# Altium PCB sim800L.PcbDoc
Units mm, origin at the board's own origin, x right, y up, seen from the top; angles counter-clockwise.
Board outline 43.9 x 53.63 mm, 2 copper layers (Top Layer, Bottom Layer); 44 components, 34 nets, 200 pads, 94 vias.
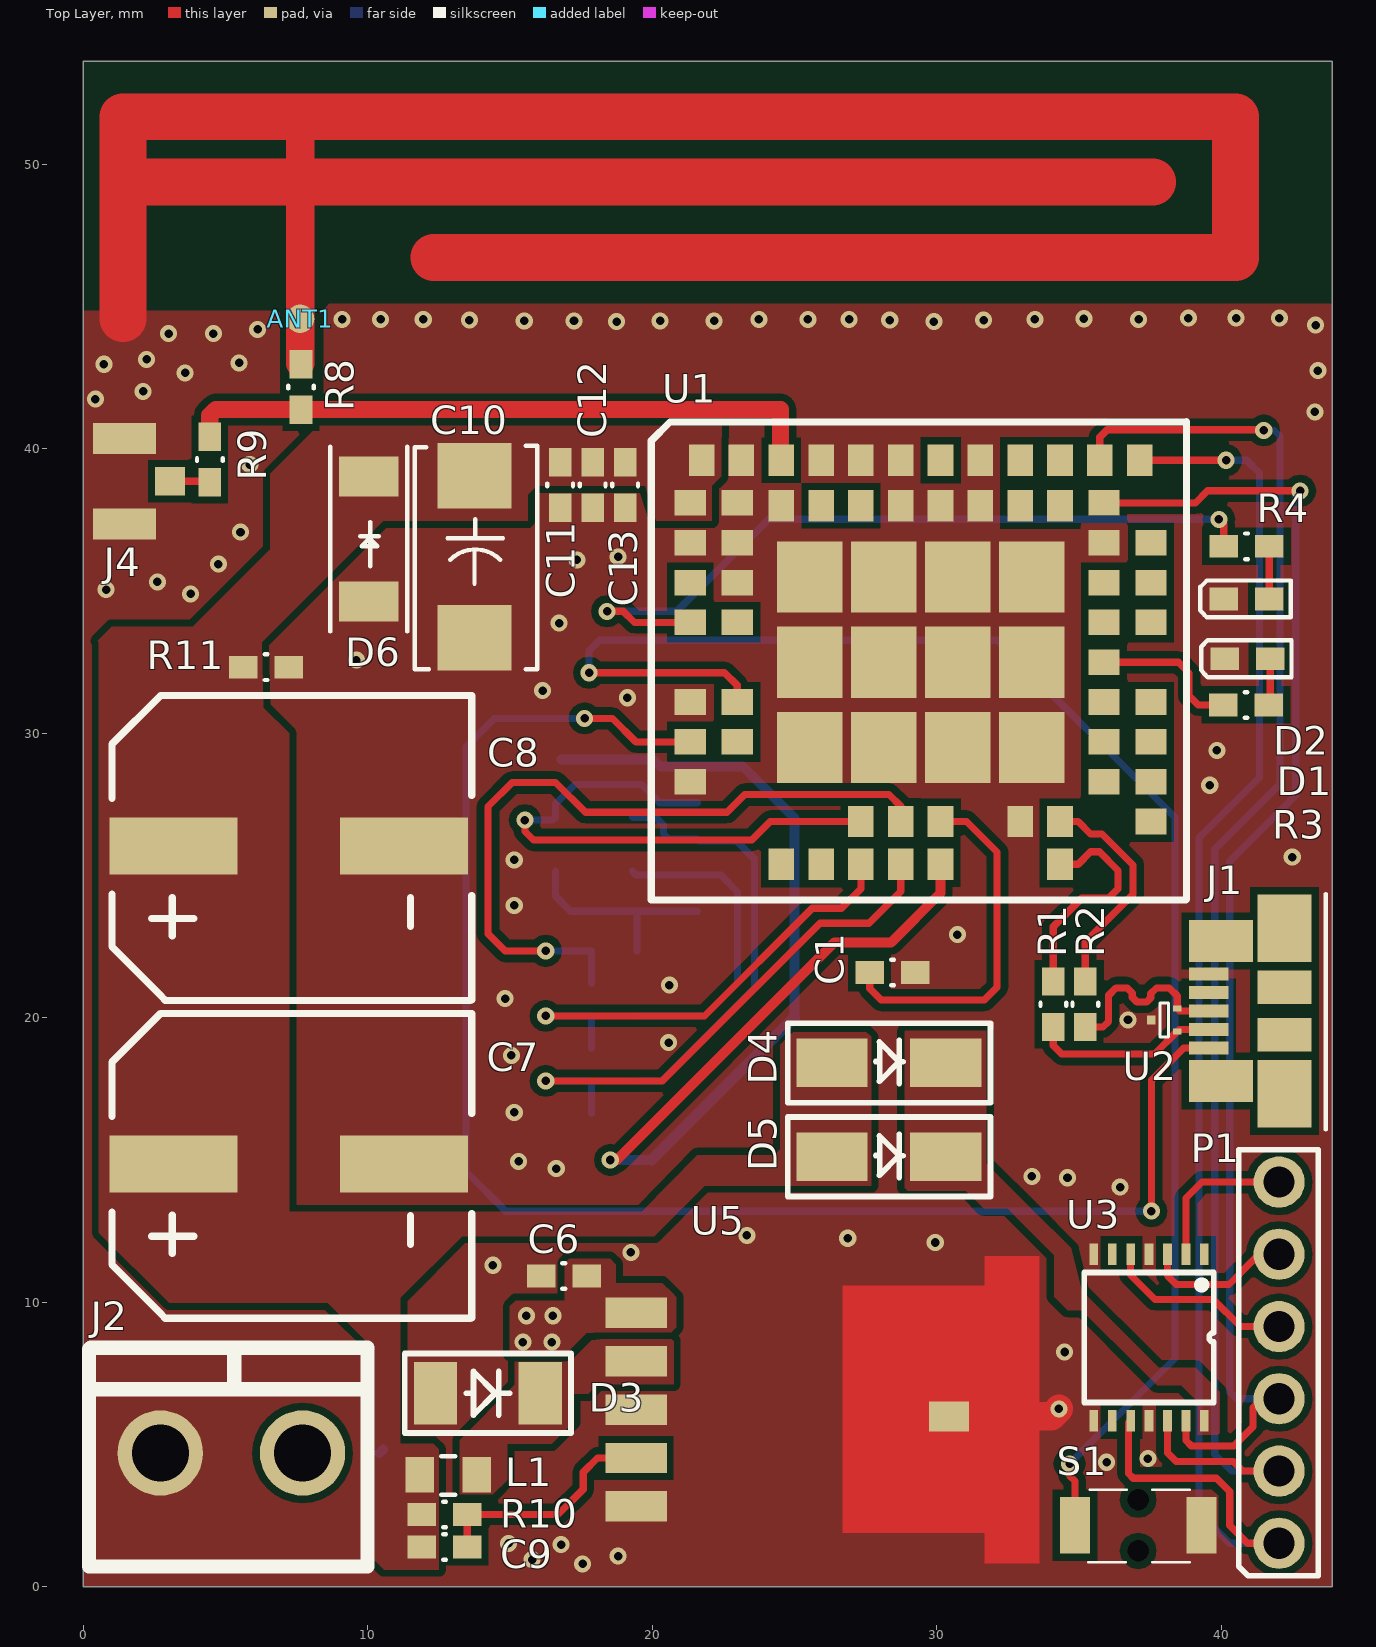
[diagram p0: Top Layer view]
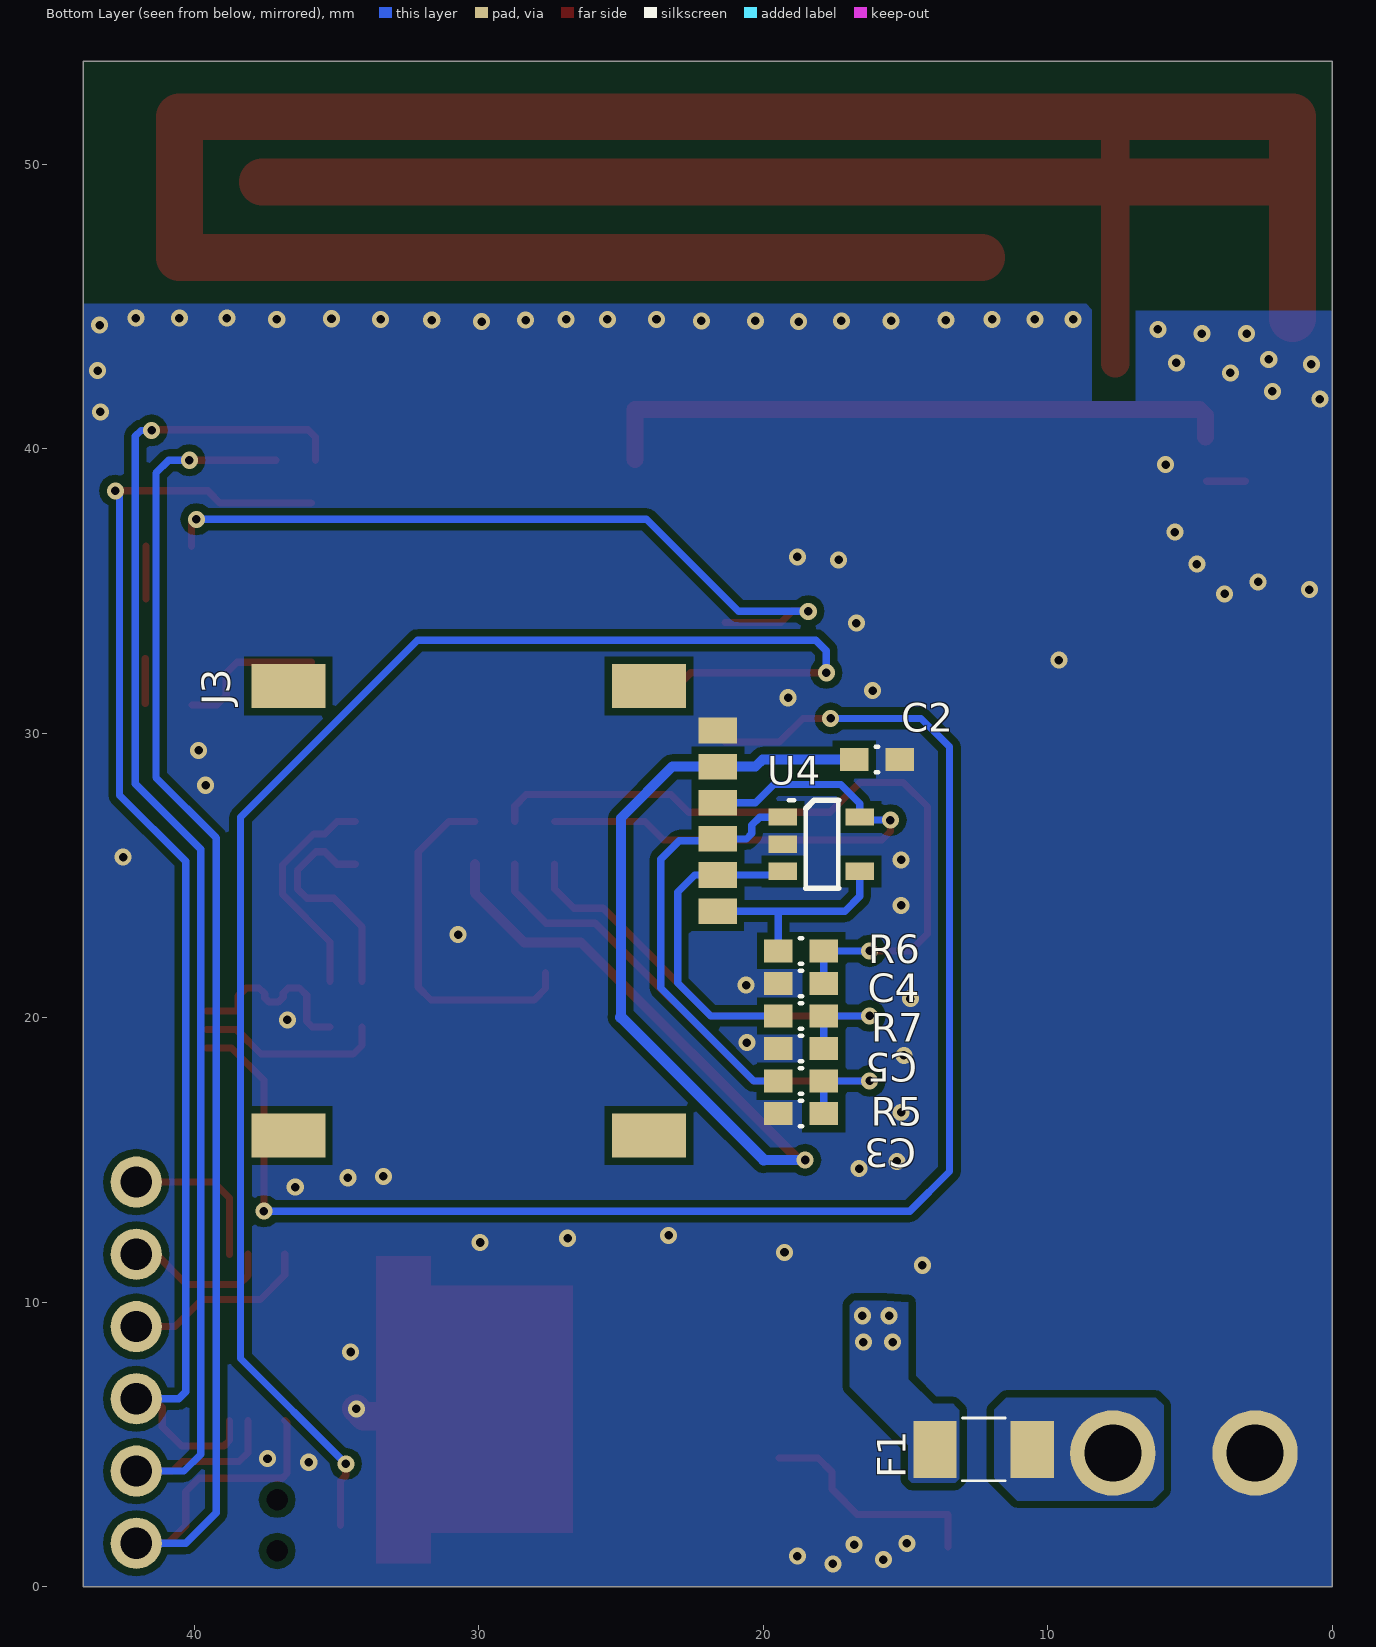
[diagram p1: Bottom Layer view, seen from below]

## Layer stack, top to bottom
Top Solder: solder mask 0.0102, Solder Resist, Dk 3.5
Top Layer: signal copper 0.0356
Dielectric 1: dielectric 0.32, FR-4, Dk 4.8
Bottom Layer: signal copper 0.0356
Bottom Solder: solder mask 0.0102, Solder Resist, Dk 3.5

## Board outline
0,53.625 0,0 43.9,0 43.9,53.625

## Design rules (kind name [scope] priority, off if disabled: settings)
Clearance Clk [InNetClass('Clk')] p1: gap=0.26 except(0.2: SMDPad-SMDPad)
Clearance [All] p2: gap=0.254 except(0.1: SMDPad-SMDPad)
DiffPairsRouting [All] p1: maxlimit=0.254 minlimit=0.254 mostfreqgap=0.254 toplayer_minwidth=0.254 toplayer_maxwidth=0.254 toplayer_prefwidth=0.254 bottomlayer_minwidth=0.254 bottomlayer_maxwidth=0.254 bottomlayer_prefwidth=0.254 maxuncoupledlength=12.7
MatchedLengths [InNetClass('DIFFPAIR')] p1: tolerance=0.1 checknetsindiffpair=FALSE checkdiffpairvsdiffpair=FALSE checkothers=TRUE
MinimumSolderMaskSliver [All] p1: minsoldermaskwidth=0.05
NetAntennae [InComponent('ANT1')] p1: netantennaetolerance=400
PlaneConnect [All] p1: planeconnectstyle=Direct reliefexpansion=0.508 reliefentries=4 reliefconductorwidth=0.254 reliefairgap=0.254
PolygonConnect [All] p1: connectstyle=Direct reliefconductorwidth=0.254 reliefentries=4 polygonreliefangle="90 Angle" airgapwidth=0.254
RoutingVias [All] p1: holewidth=0.3 width=0.6 viastyle="Through Hole" minholewidth=0.3 minwidth=0.6 maxholewidth=0.3 maxwidth=0.6
SilkToSilkClearance [All] p1: silktosilkclearance=0.1
SilkToSolderMaskClearance [IsPad] p1: minsilkscreentomaskgap=0 clearancetoexposedcopper=TRUE
SolderMaskExpansion [All] p1: expansion=0.102
Width Antenna [InNet('GND')] p1: maxlimit=1.7 minlimit=0.9 preferedwidth=1
Width RF [InNetClass('RF')] p2: maxlimit=0.6 minlimit=0.6 preferedwidth=0.6
Width Power [InNetClass('Power')] p3: maxlimit=0.4 minlimit=0.3 preferedwidth=0.35
Width [All] p4: maxlimit=0.275 minlimit=0.254 preferedwidth=0.254
24 further rules are at their usual default settings.

## Classes and differential pairs
net class DIFFPAIR: USB_N USB_P USBR_N USBR_P
net class Power: NetD3_K NetF1_1 SIMVCC VCC VIN
net class RF: RF
net class Clk: SIMCLK
net class SIM: SIM_VPP SIMCLK SIMDATA SIMRST SIMVCC
differential pair USBR: +USBR_P -USBR_N
differential pair USB: +USB_P -USB_N

## Components (designator, comment, footprint, x,y, rotation, side; value= is the part's Value field where it differs from the comment)
ANT1 "GSM-ANT" GSM-ANTENNA 1.397,44.577 r0 top
C1 "Cap" 0603 28.448,21.59 r180 top
C2 "Cap" 0603 16.002,29.083 r180 bottom
C3 "Cap" 0603 18.669,16.637 r180 bottom
C4 "Cap" 0603 18.669,21.209 r180 bottom
C5 "Cap" 0603 18.669,18.923 r180 bottom
C6 "Cap" 0603 16.891,10.922 r0 top
C7 "470uF/70mΩ/35V" Cap-Radial 3.175,14.859 r90 top
C8 "470uF/70mΩ/35V" Cap-Radial 3.175,26.035 r90 top
C9 "Cap" 0603 12.7,1.397 r0 top
C10 "100uF/0.7Ω/2917" 2917-pol 13.754,36.205 r90 top
C11 "" 0603 16.764,38.735 r90 top
C12 "" 0603 17.907,38.735 r90 top
C13 "" 0603 19.05,38.735 r90 top
D1 "LED/0603" "0603-LED- POL" 40.925,32.625 r180 top
D2 "LED/0603" "0603-LED- POL" 40.9,34.725 r180 top
D3 "Schottky Diode" "DO-214AA - Power Diode" 14.225,6.8 r0 top
D4 "1N4001 1V@1A" D0-214-AC 28.321,18.415 r0 top
D5 "1N4001 1V@1A" D0-214-AC 28.321,15.113 r0 top
D6 "5.1V/500mW/SOD128ZENER" SOD128-DIODE 10.033,36.83 r90 top
F1 "4A/32VDC/1206" fuse 10.541,4.826 r0 bottom
J1 "Micro USB" MICRO_USB 40,17.775 r180 top
J2 "PWR" "SCREW TERMINAL 1X2" 5.207,4.699 r180 top
J3 "SIM-CARD" micro_sim 21.59,30.099 r270 bottom
J4 "U.FL SMT coaxial connector" U.FL_SMT_CON 3.048,38.862 r90 top
L1 "Inductor" 0805 12.827,3.937 r180 top
P1 "Header 6H" HDR1X6 42.037,7.874 r90 top
R1 "0603" 0603 34.1,20.475 r90 top
R2 "0603" 0603 35.225,20.475 r90 top
R3 "Res1" 0603 40.875,31 r180 top
R4 "Res1" 0603 40.894,36.576 r180 top
R5 "Res1" 0603 18.669,17.78 r0 bottom
R6 "Res1" 0603 18.669,22.352 r0 bottom
R7 "Res1" 0603 18.669,20.066 r0 bottom
R8 "Res1" 0603 7.65,42.175 r90 top
R9 "Res1" 0603 4.445,39.624 r270 top
R10 "Res1" 0603 12.7,2.54 r180 top
R11 "Res1" 0603 6.425,32.325 r0 top
S1 "SW-PB" SWITCH_smd_smt_2Lead 37.084,2.159 r180 top
U1 "SIM800L" SIM800L-FOOTPRINT 21.336,38.1 r0 top
U2 "TVSdiode-ESD7L5.0DT5G" SOT-723 38,19.925 r270 top
U3 "GTL2034" TSSOP14 37.465,8.763 r270 top
U4 "TVSdiode-ESDA-SC5" SOT23-5PIN 19.304,27.051 r180 bottom
U5 "LM2596" TO-263 19.431,6.223 r180 top

## Footprints (in the part's own frame and the unit in brackets; to place one, negate y for a bottom-side part, rotate by r counter-clockwise, add the part's x,y. Pads: shape width x height; smd on the part's side, far side on the other; paste and mask are expansions set on the pad)
0603 [mm]
  rect 1x0.8 smd: 1(-0.8,0) 2(0.8,0)
  silkscreen extent -0.05,-0.45 0.05,0.45, body extent -1.11,-0.42 1.17,0.43, height 0.5
"0603-LED- POL" [mm]
  rect 1x0.8 smd mask+0.05: A(-0.8,0) K(0.8,0)
  silkscreen extent -1.55,-0.65 1.63,0.65, body extent -1.19,-0.43 1.1,0.42, height 0.5
0805 [mm]
  rect 1x1.25 smd: 1(-1,0) 2(1,0)
  silkscreen extent -0.25,-0.65 0.25,0.7, body extent -1.05,-0.63 0.95,0.62, height 0.5
2917-pol [mm]
  rect 2.3x2.6 smd: A(2.85,0) K(-2.85,0)
  silkscreen extent -3.95,-2.2 3.9,2.1, body extent -3.7,-2.2 3.65,2.1, height 3
Cap-Radial [mm] "D-10mm, L-10.2mm"
  rect 2x4.5 smd: A(0,0) K(0,-8.1)
  silkscreen extent -5.42,-10.48 5.3,2.17, body extent -5.24,-10.06 5.25,1.93, height 10.54
D0-214-AC [mm] "Shottky Diode"
  rect 2.5x1.7 smd: 1(-2,0) 2(2,0)
  silkscreen extent -3.56,-1.4 3.57,1.4, body extent -2.74,-1.39 2.74,1.4, height 2.3
"DO-214AA - Power Diode" [mm]
  rect 1.52x2.18 smd: A(-1.84,0) K(1.84,0)
  silkscreen extent -2.92,-1.4 2.92,1.4, body extent -2.75,-2.03 2.75,1.87, height 2.45
fuse [mm]
  rect 1.52x2 smd: 1(0,0) 2(3.42,0)
  silkscreen extent 0.95,-1.1 2.45,1.1, body extent 0.04,-0.85 3.26,0.88, height 0.53
GSM-ANTENNA [mm] "GSM PCB antenna"
  round 1 smd paste+0 mask+0: 1(6.223,0)
  Top Layer lines w1: 6.223,0 6.223,4.8 6.223,7.1
  Top Layer lines w1.651: 0,0 0,7.1 39.1,7.1 ; 0,4.8 36.2,4.8 ; 10.922,2.159 39.116,2.159 39.116,7.086
HDR1X6 [mm]
  round 1.8 hole 1.1: 1(-6.35,0) 2(-3.81,0) 3(-1.27,0) 4(1.27,0) 5(3.81,0) 6(6.35,0)
  silkscreen extent -7.49,-1.38 7.49,1.42, body extent -7.58,-1.26 7.66,1.28, height 9.51
micro_sim [mm] "http://www.uctronics.com/5pcs-micro-sim-6pin-1-35h-auto-pop-card-socket-slot-adapter-for-mini-phone-card.html"
  rect 0.9x1.35 smd: 1(1.27,0) 2(0,0) 3(3.81,0) 4(2.54,0) 5(6.35,0) 6(5.08,0)
  rect 1.55x2.6 smd: 7(-1.56,-15.105) 7(-1.56,-2.425) 7(14.24,-15.105) 7(14.24,-2.425)
  body extent -1.98,-16.94 14.77,0.39, height 1.55
MICRO_USB [mm]
  rect 1.38x0.45 smd: 1(0.435,-1.162) 2(0.435,-1.813) 3(0.435,-2.463) 4(0.435,-3.113) 5(0.435,-3.763)
  rect 1.9x2.375 smd: ""(-2.225,0.45) ""(-2.225,-5.375)
  rect 1.9x1.175 smd: ""(-2.225,-3.3) ""(-2.225,-1.625)
  rect 2.25x1.475 smd: ""(0,0) ""(0,-4.925)
  silkscreen extent -3.67,-6.58 -3.67,1.7, body extent -4.67,-6.51 0.76,1.47, height 2.77
"SCREW TERMINAL 1X2" [mm]
  round 3 hole 2 paste+0 mask+0: 1(-2.5,0) 2(2.5,0)
  silkscreen extent -4.79,-3.7 5.01,3.99, body extent -4.91,-4.32 5.09,4.68, height 13.51
SIM800L-FOOTPRINT [mm]
  rect 1.1x0.9 smd mask+0: 1(0,0) 2(0,-1.4) 3(0,-2.8) 4(0,-4.2) 6(0,-7) 7(0,-8.4) 8(0,-9.8) 22(16.2,-11.2) 23(16.2,-9.8) 24(16.2,-8.4) 25(16.2,-7) 27(16.2,-4.2) 28(16.2,-2.8) 29(16.2,-1.4) 43(1.65,0) 44(1.65,-1.4) 45(1.65,-2.8) 46(1.65,-4.2) 48(1.65,-7) 49(1.65,-8.4) 61(14.55,-9.8) 62(14.55,-8.4) 63(14.55,-7) 64(14.55,-5.6) 65(14.55,-4.2) 66(14.55,-2.8) 67(14.55,-1.4) 68(14.55,0)
  rect 0.9x1.1 smd mask+0: 12(3.2,-12.7) 13(4.6,-12.7) 14(6,-12.7) 15(7.4,-12.7) 16(8.8,-12.7) 19(13,-12.7) 31(15.8,1.5) 32(14.4,1.5) 33(13,1.5) 34(11.6,1.5) 35(10.2,1.5) 36(8.8,1.5) 37(7.4,1.5) 38(6,1.5) 39(4.6,1.5) 40(3.2,1.5) 41(1.8,1.5) 42(0.4,1.5) 54(6,-11.2) 55(7.4,-11.2) 56(8.8,-11.2) 58(11.6,-11.2) 59(13,-11.2) 69(13,-0.1) 70(11.6,-0.1) 71(10.2,-0.1) 72(8.8,-0.1) 73(7.4,-0.1) 74(6,-0.1) 75(4.6,-0.1) 76(3.2,-0.1)
  rect 2.3x2.5 smd mask+0: 77(4.2,-2.6) 78(4.2,-5.6) 79(4.2,-8.6) 80(6.8,-8.6) 81(9.4,-8.6) 82(12,-8.6) 83(12,-5.6) 84(12,-2.6) 85(9.4,-2.6) 86(6.8,-2.6) 87(6.8,-5.6) 88(9.4,-5.6)
  silkscreen extent -1.37,-13.96 17.45,2.86, body extent -1.26,-13.88 17.41,2.76, height 2
SOD128-DIODE [mm]
  rect 1.4x2.1 smd: A(-2.2,0) K(2.2,0)
  silkscreen extent -3.25,-1.35 3.25,1.35, body extent -2.6,-1.35 2.6,1.35, height 1.11
SOT23-5PIN [mm]
  rect 1x0.6 smd: 1(0,0) 2(0,-0.95) 3(0,-1.9) 4(2.7,-1.9) 5(2.7,0)
  silkscreen extent 0.2,-2.5 1.95,0.6, body extent 0.4,-2.55 2.3,0.6, height 1.45
SOT-723 [mm]
  rect 0.21x0.29 smd: 1(-0.4,0.455) 2(0.4,0.455)
  rect 0.31x0.29 smd: 3(0,-0.455)
  silkscreen extent -0.6,-0.15 0.6,0.15, body extent -0.63,-0.52 0.62,0.53, height 0.45
SWITCH_smd_smt_2Lead [mm]
  rect 1.05x2 smd: 1(-2.225,0) 2(2.225,0)
  round 0 hole 0.75: ""(0,0.9) ""(0,-0.9)
  silkscreen extent -1.8,-1.25 1.75,1.3, body extent -2.24,-1.26 2.24,1.29, height 2
TO-263 [mm] "6-pin"
  rect 1.4x1.05 smd: 0(-11.001,0.235)
  rect 2.16x1.07 smd: 1(0,-3.4) 2(0,-1.7) 3(0,0) 4(0,1.7) 5(0,3.4)
  Top Layer region: -14.17,5.4 -12.26,5.4 -12.26,4.331 -7.264,4.331 -7.264,-4.356 -12.26,-4.356 -12.26,-5.4 -14.17,-5.4
  body extent -12.59,-5.19 -0.46,5.22, height 5.1
TSSOP14 [mm]
  rect 0.75x0.3 smd: 1(-2.925,1.95) 2(-2.925,1.3) 3(-2.925,0.65) 4(-2.925,0) 5(-2.925,-0.65) 6(-2.925,-1.3) 7(-2.925,-1.95) 8(2.925,-1.95) 9(2.925,-1.3) 10(2.925,-0.65) 11(2.925,0) 12(2.925,0.65) 13(2.925,1.3) 14(2.925,1.95)
  silkscreen extent -2.28,-2.28 2.29,2.28, body extent -3.19,-2.51 3.21,2.49, height 1.21
U.FL_SMT_CON [mm]
  rect 1x1.06 smd mask+0: 1(0,0)
  rect 1.1x2.2 smd mask+0: 2(1.5,1.6) 3(-1.5,1.6)
  body extent -1.84,-0.23 1.92,2.5, height 0.7

## Part data
C1 C2 C3 C4 C5 C6 C9: "Capacitor"
C7 C8 C10: library part Cap-Pol
C11 C12 C13: library part Cap, "Capacitor"
D1 D2: library part LED-SMD
D4 D5: library part "Diode 1N4001", "1 Amp General Purpose Rectifier"
D6: library part ZENER-DIODE, "Zener Diode"
F1: library part "Fuse 2", "Fuse"
J1: library part "USB - micro B"
J2: library part "Header 2"
J3: library part XNT-0121AAAA07A, "6-PIN SIM HOLDER"
P1: "Header, 6-Pin, Right Angle"
R1 R2: library part Res1, "Resistor"
R3 R4 R5 R6 R7 R8 R9 R10 R11: "Resistor"
S1: "Switch"
U2: library part SPS3222
U4: library part SMS05T1

## Via types
v1: diameter 0.6, hole 0.3, Top Layer to Bottom Layer, tented both sides, 94 vias

## Nets (pads, with @x,y where several pads share a name; then routed paths per layer and width w, separated by ;. In a path a pad name is that pad's centre, name@x,y a point inside that pad or via, vN(x,y) a via of type N, cw(c..) or ccw(c..) an arc to the next point about the centre after c; other vN are vias at no path point)
GND: ANT1.1 C1.1 C2.2 C3.1 C4.1 C5.1 C6.1 C7.K C8.K C10.K C11.1 C12.1 C13.1 D1.K D2.K D3.A D6.A J1.5 J2.2 J3.2 J4.2 J4.3 R8.2 R11.2 S1.1 U1.2 U1.6 U1.8 U1.35 U1.37 U1.38 U1.39 U1.41 U1.43 U1.44 U1.45 U1.58 U1.67 U1.71 U1.72 U1.73 U1.76 U1.77 U1.78 U1.79 U1.80 U1.81 U1.82 U1.83 U1.84 U1.85 U1.86 U1.87 U1.88 U2.3 U3.4 U3.7 U3.8 U3.11 U4.2 U5.0 U5.3 U5.5 | length 5.5
  Top Layer w1: R8.2@7.62,43.005 ANT1.1 ; U5.0 34.038,5.988 v1(34.3,6.25)
  other v1: 17.55,0.8 15.775,0.95 18.8,1.075 16.8,1.475 14.95,1.525 35.975,4.375 37.425,4.5 34.5,8.25 14.4,11.3 19.25,11.75 29.95,12.1 26.875,12.25 23.325,12.35 36.45,14.05 34.6,14.375 33.35,14.425 16.625,14.7 15.3,14.95 15.15,16.675 15.05,18.675 20.575,19.125 36.727,19.926 14.825,20.675 20.6,21.15 30.725,22.925 15.15,23.95 15.15,25.55 42.5,25.65 39.6,28.175 39.85,29.4 19.125,31.25 16.15,31.5 9.6,32.575 16.725,33.875 3.775,34.9 0.8,35.05 2.6,35.325 4.75,35.95 17.35,36.1 18.8,36.2 5.525,37.075 5.85,39.45 43.3,41.3 0.425,41.75 2.1,42.025 3.575,42.675 43.4,42.75 0.725,42.975 5.475,43.025 2.225,43.15 3,44.05 4.575,44.05 6.125,44.2 43.325,44.35 18.75,44.475 29.9,44.475 15.5,44.5 17.25,44.5 20.275,44.5 22.175,44.5 13.575,44.525 28.35,44.525 31.65,44.525 9.1,44.55 10.45,44.55 11.95,44.55 23.75,44.55 25.475,44.55 26.925,44.55 33.45,44.55 37.1,44.55 35.175,44.575 38.85,44.6 40.525,44.6 42.05,44.6
NetC1_2: C1.2 U1.56 | length 12.6
  Top Layer w0.254: C1.2 27.648,21.027 28.05,20.625 31.675,20.625 32.125,21.075 32.125,25.825 31.05,26.9 U1.56
NetC9_2: C9.2 R10.1 U5.4 | length 8.2
  Top Layer w0.254: C9.2 R10.1 16.69,2.54 17.575,3.425 17.575,4.025 18.073,4.523 U5.4
NetD1_A: D1.A R3.1 | length 1.6
  Top Layer w0.254: R3.1@41.725,31.05 D1.A
NetD2_A: D2.A R4.1 | length 1.8
  Top Layer w0.254: D2.A@41.694,34.731 R4.1
NetD3_K: D3.K L1.1 U5.2
NetF1_1: F1.1 J2.1 | length 0.2
  Bottom Layer w0.35: F1.1@10.414,4.699 F1.1
NetJ3_3: J3.3 R5.2 U4.1 | length 15
  Bottom Layer w0.254: U4.1 20.124,27.051 20.4,26.775 20.4,26.475 20.586,26.289 J3.3 ; R5.2 20.33,17.78 23.6,21.05 23.6,25.575 22.95,26.225 J3.3@21.654,26.225
NetJ3_5: J3.5 R6.2 U4.4 | length 7.5
  Bottom Layer w0.254: U4.4 16.604,24.271 17.126,23.749 J3.5 ; R6.2 19.469,23.73
NetJ3_6: J3.6 R7.2 U4.3 | length 11.2
  Bottom Layer w0.254: U4.3 19.436,25.019 J3.6 22.406,25.019 23,24.425 23,21.225 21.841,20.066 R7.2
NetJ4_1: J4.1 R9.2 | length 1.4
  Top Layer w0.254: J4.1 R9.2@4.407,38.862
NETSTAT_5: R3.2 U1.64 | length 5.3
  Top Layer w0.254: U1.64 38.5,32.5 38.875,32.125 38.875,31.325 39.2,31 R3.2
PWRKEY: S1.2 U1.48 | length 56.6
  Top Layer w0.254: v1(17.78,32.131) 22.544,32.131 22.986,31.689 U1.48 ; v1(34.671,4.318) 34.671,3.904 34.859,3.716 S1.2
  Bottom Layer w0.254: v1(17.78,32.131) 17.78,32.905 18.15,33.275 32.15,33.275 38.376,27.049 38.376,8.023 v1(34.671,4.318)
PWRSTAT_5: R4.2 U1.4 | length 27
  Top Layer w0.254: v1(18.415,34.29) 18.985,34.29 19.375,33.9 U1.4 ; v1(39.925,37.525) 40.094,37.356 R4.2
  Bottom Layer w0.254: v1(18.415,34.29) 20.865,34.29 24.1,37.525 v1(39.925,37.525)
RF: R8.1 R9.1 U1.40 | length 22.7
  Top Layer w0.6: R9.1 4.445,41.17 4.658,41.383 24.511,41.383 U1.40@24.511,39.625
RI_3V3: P1.6 U3.2 | length 5.5
  Top Layer w0.254: U3.2 38.765,13.665 39.324,14.224 P1.6
RI_5: P1.3 U1.68 U3.13 | length 46.7
  Top Layer w0.254: U1.68 39.1,38.1 39.525,38.525 v1(42.775,38.525) ; U3.13 38.765,5.135 38.95,4.95 40.45,4.95 41.125,5.625 41.125,6.3 41.429,6.604 P1.3
  Bottom Layer w0.254: P1.3 40.546,6.604 40.3,6.85 40.3,25.5 42.625,27.825 42.625,38.375 v1(42.775,38.525)
RXD_3V3: P1.4 U3.5 | length 6.7
  Top Layer w0.254: U3.5 36.815,10.96 37.675,10.1 39.725,10.1 40.681,9.144 P1.4
RXD_5: P1.1 U1.31 U3.10 | length 54
  Top Layer w0.254: U3.10 36.744,5.767 36.744,3.981 36.91,3.815 39.835,3.815 40.3,3.35 40.3,2.15 40.926,1.524 P1.1 ; U1.31 v1(40.175,39.6)
  Bottom Layer w0.254: v1(40.175,39.6) 40.9,39.6 41.35,39.15 41.35,28.45 39.225,26.325 39.225,2.6 40.301,1.524 P1.1
SIM_VPP: J3.4 U1.54 U4.5 | length 19.7
  Top Layer w0.254: v1(15.525,26.95) 15.525,26.55 15.825,26.25 23.5,26.25 24.15,26.9 U1.54
  Bottom Layer w0.254: v1(15.525,26.95) 16.503,26.95 U4.5 16.604,27.529 17.275,28.2 19.625,28.2 20.266,27.559 J3.4
SIMCLK: C4.2 R6.1 U1.55 | length 25.8
  Top Layer w0.254: v1(16.256,22.352) 14.823,22.352 14.225,22.95 14.225,27.425 15.075,28.275 16.6,28.275 17.65,27.225 22.625,27.225 23.25,27.85 28.325,27.85 28.736,27.439 U1.55
  Bottom Layer w0.254: v1(16.256,22.352) R6.1 C4.2
SIMDATA: C5.2 R7.1 U1.14 | length 16.6
  Top Layer w0.254: v1(16.256,20.066) 21.841,20.066 25.625,23.85 26.65,23.85 27.336,24.536 U1.14
  Bottom Layer w0.254: v1(16.256,20.066) R7.1 C5.2
SIMRST: C3.2 R5.1 U1.15 | length 19
  Top Layer w0.254: v1(16.256,17.78) 20.355,17.78 25.9,23.325 27.625,23.325 28.736,24.436 U1.15
  Bottom Layer w0.254: v1(16.256,17.78) R5.1 C3.2
SIMVCC: C2.1 J3.1 U1.16 | length 40.9
  Top Layer w0.35: v1@18.725,14.975 26.4,22.65 28.4,22.65 30.136,24.386 U1.16
  Bottom Layer w0.35: C2.1 20.017,29.083 20.271,28.829 J3.1 23.196,28.829 25,27.025 25,20.025 ; v1(18.525,15) 19.975,15
  Bottom Layer w0.4: 19.975,15 25,20.025
TXD_3V3: P1.5 U3.3 | length 5.2
  Top Layer w0.254: U3.3 38.115,10.935 38.425,10.625 40.275,10.625 41.334,11.684 P1.5
TXD_5: P1.2 U1.32 U3.12 | length 51.9
  Top Layer w0.254: U1.32 35.736,40.411 36,40.675 v1@41.475,40.675 ; U3.12 38.115,4.71 38.425,4.4 40.425,4.4 40.761,4.064 P1.2
  Bottom Layer w0.254: v1(41.5,40.65) 41.875,40.65 42.075,40.45 42.075,28.225 39.775,25.925 39.775,4.65 40.361,4.064 P1.2
USB_N: R1.2 U1.19 | length 7.9
  Top Layer w0.254: R1.2 34.1,23.2 35.1,24.2 36.039,24.2 36.375,24.536 36.375,25.182 35.721,25.836 35.409,25.836 34.973,25.4 U1.19
USB_P: R2.2 U1.59 | length 8
  Top Layer w0.254: U1.59 34.973,26.9 35.409,26.465 35.81,26.465 36.9,25.375 36.9,24.342 35.225,22.667 R2.2
USBR_N: J1.2 R1.1 U2.2 | length 6.5
  Top Layer w0.254: R1.1 34.1,19.025 34.4,18.725 37.655,18.725 U2.2 ; U2.2@38.518,19.587 J1.2
USBR_P: J1.3 R2.1 U2.1 | length 6.6
  Top Layer w0.254: R2.1 35.85,19.675 36.046,19.871 36.046,20.796 36.3,21.05 36.7,21.05 36.875,20.875 36.875,20.725 37.05,20.55 37.375,20.55 37.525,20.7 37.525,20.85 37.725,21.05 38.175,21.05 38.455,20.77 U2.1 38.542,20.238 J1.3
VBUS: J1.1 U1.7 | length 55.4
  Top Layer w0.254: v1@17.6,30.5 v1(17.625,30.525) 18.6,30.525 19.425,29.7 U1.7 ; v1(37.55,13.2) 37.55,17.8 38.687,18.937 J1.1
  Bottom Layer w0.254: v1(17.625,30.525) 14.45,30.525 13.45,29.525 13.45,14.6 14.85,13.2 v1(37.55,13.2)
VCC: C7.A C8.A C9.1 C10.A C11.2 C12.2 C13.2 D4.1 D5.1 D6.K L1.2 R10.2 R11.1 U1.1 U1.42
VCC_3V3: D4.2 D5.2 U3.14
VIN: C6.2 F1.2 U5.1
  other v1: 15.45,8.6 16.475,8.6 15.575,9.525 16.51,9.525
pads on no net: J1. J1.4 J3.7 S1. U1.3 U1.12 U1.13 U1.22 U1.23 U1.24 U1.25 U1.27 U1.28 U1.29 U1.33 U1.34 U1.36 U1.46 U1.49 U1.61 U1.62 U1.63 U1.65 U1.66 U1.69 U1.70 U1.74 U1.75 U3.1 U3.6 U3.9

## Polygon pours and split planes (outlines as drawn)
NetD3_K on Top Layer "NetD3_K" (solid, pour order 34): 13.225,5.15 13.225,3.25 14.4,3.25 14.525,3.375 14.9,3.75 14.9,5.025 16.475,5.025 17.075,5.625 17.225,5.775 17.225,6.775 17.75,6.775 18.075,7.1 18.1,7.125 20.75,7.125 20.75,8.725 18.025,8.725 17.925,8.725 17.225,8.025 17.15,7.95 15.175,7.95 15.175,7.1
VIN on Top Layer "Vin" (solid, pour order 2): 20.675,8.95 18.175,8.95 17.687,8.912 16.95,8.175 15,8.175 15,9.85 15.2,10.05 16.925,10.05 16.925,11.375 17.075,11.525 18.325,11.525 18.525,11.525 18.725,11.325 18.725,10.675 20.35,10.675 20.7,10.325 20.85,10.175 20.85,9.125
VCC_3V3 on Top Layer "VCC_3v3" (solid, pour order 0): 28.875,19.525 28.9,19.55 31.75,19.55 31.75,14.875 33.35,13.275 34.75,11.875 34.725,11.875 35.1,10.4 37.325,8.175 37.8,7.7 38.9,7.7 39.1,7.7 39.925,6.875 39.95,6.85 39.95,5.475 39.95,5.4 39.875,5.325 39.175,5.325 39.175,6.5 39.075,6.6 38.6,7.075 38.3,7.075 37.75,7.075 37.225,7.6 35.1,9.725 34.7,9.725 34.6,9.725 34.425,9.9 34.125,10.2 34.125,11.65 32.475,13.3 31.65,13.3 31.15,13.8 31.025,13.925 28.975,13.925 28.875,14.025
VCC on Top Layer "VCC" (solid, pour order 42): 7.241,30 6.333,30.908 6.275,33.2 10.55,37.475 15.625,37.475 15.625,38.384 15.941,38.7 19.75,38.7 20.15,37.475 22.1,37.475 22.1,38.7 22.475,39.075 22.45,39.1 22.45,40.825 8.275,40.825 6.625,39.175 6.575,39.125 6.575,36.45 6.55,36.45 3.9,33.8 3.85,33.75 1.1,33.75 1,33.75 0.5,33.25 0.55,33.2 0.55,18.85 0.55,12.45 3,10 3.025,9.975 8.55,9.975 8.6,9.975 10.025,8.55 10.25,8.325 10.25,0.95 10.25,0.925 10.55,0.625 10.575,0.6 12.5,0.6 12.5,3.075 12.5,4.675 12.5,4.825 12.325,5 12.3,5.025 11.15,5.025 11.15,10.15 13.3,12.3 13.325,12.325 19.625,12.325 20.075,12.325 21.775,14.025 21.85,14.1 27.7,14.1 27.7,19.325 27.525,19.5 25.025,19.5 24.95,19.5 24.875,19.425 24.5,19.05 24.5,16.075 24.5,15.375 24.325,15.2 24.3,15.175 21.625,15.175 21.575,15.175 19.625,13.175 7.241,13.175
GND on Top Layer "GND plane" (solid, pour order 44): 0,45.425 43.9,45.425 43.9,0 0,0
VIN on Bottom Layer "Vin" (solid, pour order 10): 13.25,3.65 13.1,3.8 13.1,6.15 13.1,6.2 13.225,6.325 13.325,6.425 14.025,6.425 14.9,7.3 14.9,9.275 14.9,10 15.675,10.05 16.8,10.05 16.95,9.9 16.95,9.125 16.95,7.025 14.9,4.975 14.9,3.85 14.9,3.775 14.8,3.675 14.775,3.65
NetF1_1 on Bottom Layer "NetF1_1" (solid, pour order 6): 5.925,6.375 5.925,3.4 6.3,3.025 9.675,3.025 11.075,3.025 11.875,3.825 11.875,6.125 11.875,6.225 11.575,6.525 11.45,6.65 6.45,6.65 6.2,6.65 5.925,6.375
GND on Bottom Layer "GND plane" (solid, pour order 38): 43.9,45.1 0,45.1 0,0 43.9,0

## Other copper
Top Layer:
  pour cut-out: 0,44.85 3.875,44.85 6.902,44.85 6.896,41.55 8.45,41.55 8.45,44.9 8.65,45.1 43.9,45.1 43.9,53.625 0,53.625
Bottom Layer:
  pour cut-out: 0,53.625 43.9,53.625 43.9,53.375 43.9,45.1 8.65,45.1 8.45,44.9 8.45,41.675 6.9,41.675 6.9,44.85 0,44.85